# Allegro board temperature.brd
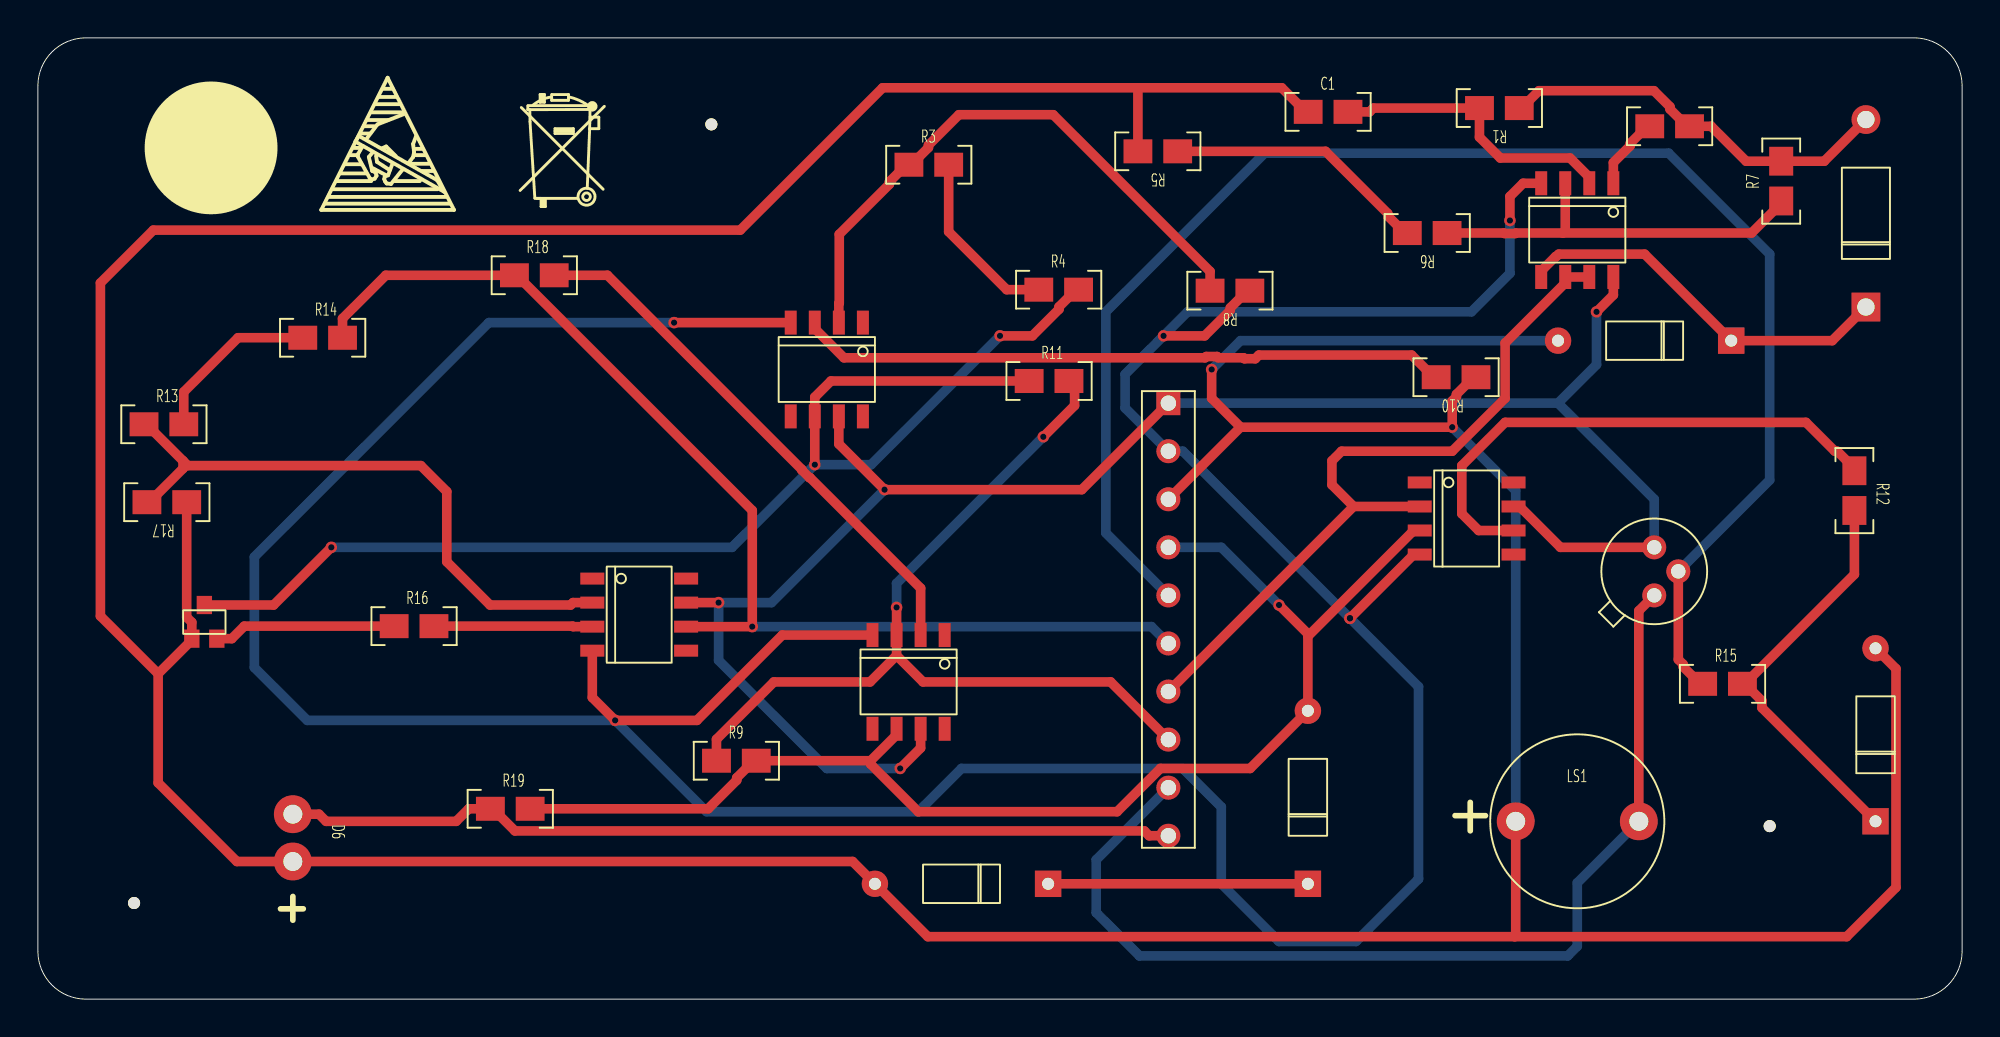
[diagram p0: board, top side]
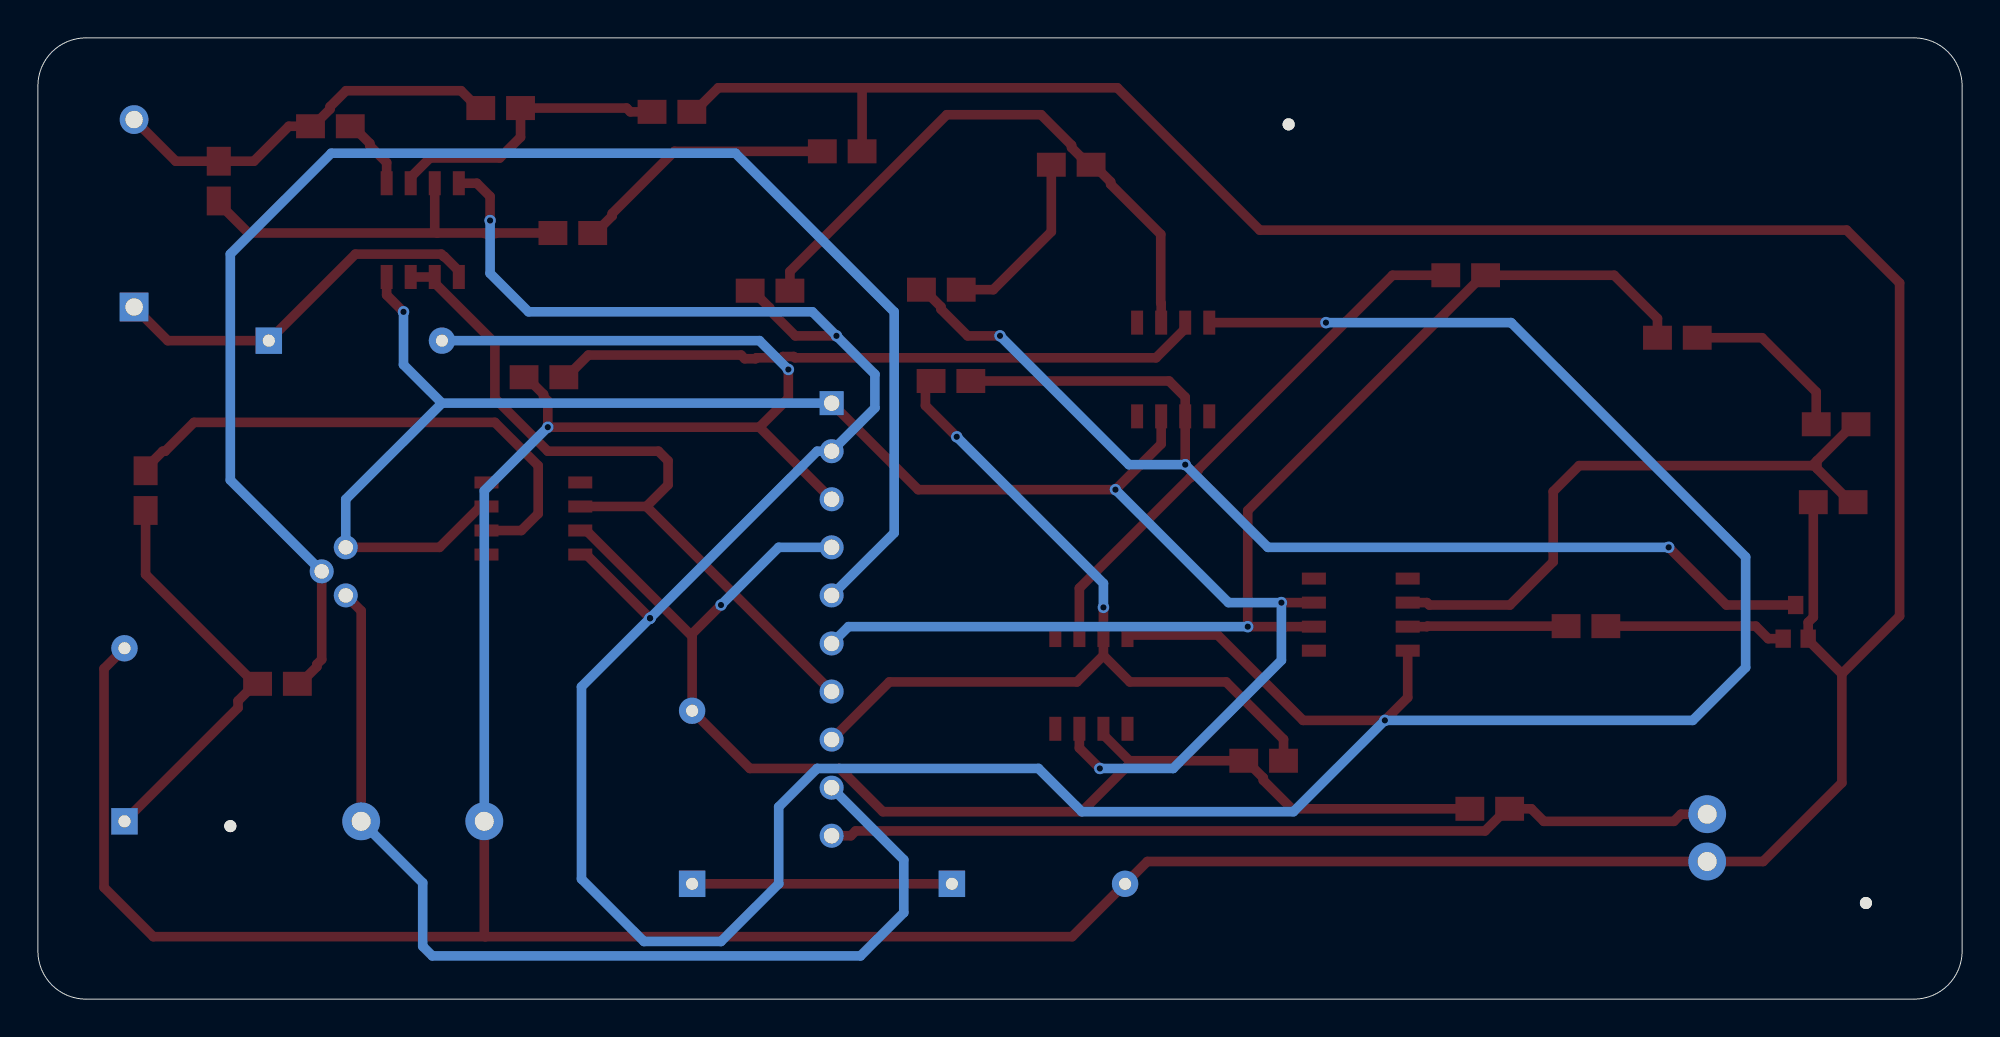
[diagram p1: board, bottom side, seen from below]

Outline 101.6 x 50.8 mm; copper layers: TOP, BOTTOM. Coordinates in mm from the lower left corner of the outline.
Outline path: 0,48.26 arc(0.74,50.06) 2.54,50.8 99.06,50.8 arc(100.86,50.06) 101.6,48.26 101.6,2.54 arc(100.86,0.74) 99.06,0 2.54,0 arc(0.74,0.74) 0,2.54 0,48.26

## Placement (name value [footprint] x y rotation side)
C1  0.1u  [0805]  68.07 46.99 0 top
D1  D1N5819/ON  [DO41-1]  96.52 36.58 0 top
D2  1n5231/ON  [DO35-1]  89.41 34.8 90 top
D3  1N4099  [DO35-1]  97.03 9.4 0 top
D4  1N4617  [DO35-1]  67.06 6.1 0 top
D5  1N4617  [DO35-1]  53.34 6.1 90 top
D6  LP_A676-TYP  [FG]  13.46 7.87 270 top
J1  HEADER 10  [SIP]  59.69 31.5 0 top
LS1  BUZZER  [FMQ]  81.28 9.4 0 top
NOREF  -  []  30.23 44.96 0 top
NOREF#2  -  [unnamed#2]  91.44 9.14 0 top
NOREF#3  -  [unnamed#2]  5.08 5.08 0 top
NOREF#4  -  []  9.65 45.21 0 top
NOREF#5  -  [unnamed#2]  35.56 46.23 0 top
NOREF#6  -  []  17.78 44.7 0 top
Q1  2N2222A  [TO18]  85.34 21.34 0 top
R1  4.7k  [0805]  77.22 46.99 180 top
R2  330  [0805]  86.11 46.23 0 top
R3  33k  [0805]  46.99 44.2 0 top
R4  2.4k  [0805]  53.85 37.59 0 top
R5  130k  [0805]  59.18 44.7 180 top
R6  9.1k  [0805]  73.41 40.39 180 top
R7  100k  [0805]  91.95 43.18 90 top
R8  100k  [0805]  62.99 37.34 180 top
R9  56k  [0805]  36.83 12.7 0 top
R10  100k  [0805]  74.93 32.77 180 top
R11  390  [0805]  53.34 32.77 0 top
R12  1.8k  [0805]  96.01 26.92 270 top
R13  30k  [0805]  6.6 30.48 0 top
R14  200  [0805]  14.99 35.05 0 top
R15  1.8k  [0805]  88.9 16.76 0 top
R16  100k  [0805]  19.81 19.81 0 top
R17  20k  [0805]  6.86 26.16 180 top
R18  10k  [0805]  26.16 38.35 0 top
R19  56  [0805]  24.89 10.16 0 top
U1  LM2904/ON  [SOIC8]  81.28 40.64 270 top
U2  LM741_1  [SOIC8]  75.44 25.4 0 top
U3  LM741_1  [SOIC8]  41.66 33.27 270 top
U4  TMP20  [SC70]  8.13 19.05 90 top
U5  LM741_1  [SOIC8]  31.75 20.32 0 top
U6  LM741_1  [SOIC8]  45.97 16.76 270 top

## Library data of the parts
C1 = C
D1 = D1N5819/ON_1
D2 = 1n5231/ON_0
D3 = 1N4099_0
D4 D5 = 1N4617_0
D6 = LP_A676-TYP
J1 = HEADER 10
LS1 = BUZZER
Q1 = 2N2222A
R1-R19 = R
U1 = LM2904/ON: Tolerance: ***; User Part Number: ***
U2 U3 U5 U6 = LM741_1: Tolerance: ***; User Part Number: ***
U4 = TMP20_0

## Footprints (pads in the part's own frame, mm; a bottom-side part is the same pattern mirrored in y, then rotated)
0805
  rect 1.524x1.27 smd: 1(-1,-0.1) 2(1.1,-0.1)
DO35-1
  round 1.397 hole 0.635: 1(0,9.144)
  rect 1.397x1.397 hole 0.635: 2(0,0)
DO41-1
  round 1.524 hole 0.914: 1(0,9.906)
  rect 1.524x1.524 hole 0.914: 2(0,0)
FG
  round 2 hole 1: 1(-1.9,0) 2(0.6,0)
FMQ
  round 2 hole 1: 1(-3.25,0) 2(3.25,0)
SC70
  rect 0.965x0.813 smd: 1(0,0) 2(0,-1.321) 3(1.778,-0.66)
SIP
  rect 1.27x1.27 hole 0.813: 1(0,0)
  round 1.27 hole 0.813: 2(0,-2.54) 3(0,-5.08) 4(0,-7.62) 5(0,-10.16) 6(0,-12.7) 7(0,-15.24) 8(0,-17.78) 9(0,-20.32) 10(0,-22.86)
SOIC8
  rect 1.27x0.635 smd: 1(-2.477,1.905) 2(-2.477,0.635) 3(-2.477,-0.635) 4(-2.477,-1.905) 5(2.477,-1.905) 6(2.477,-0.635) 7(2.477,0.635) 8(2.477,1.905)
TO18
  round 1.27 hole 0.762: 1(0,0) 2(1.27,1.27) 3(0,2.54)
unnamed#2
  round 0.635 hole 3.175 unplated: (0,0)

## Nets
+10V: J1.1 Q1.3(C) U1.8(V+) U2.7(V+) U3.7(V+) U5.7(V+) U6.7(V+)
-10V: J1.2 R8.1 U1.4(V-) U2.4(V-) U3.4(V-) U5.4(V-) U6.4(V-)
0: C1.1 D2.1 D3.1(A) D5.1(A) D6.2 J1.3 LS1.1(A) R5.2 R10.1 R17.1 U4.1(GND)
AC: J1.5 Q1.2(B) R15.1
BUZZER: J1.9 LS1.2(B) Q1.1(E)
DC: D4.1(A) J1.4 R9.2 R19.2 U2.3(IN+) U6.6(OUT)
LED: D6.1 J1.10 R19.1
REF: J1.8 R9.1 R11.2 U6.3(IN+)
SQUARE: J1.7 U1.6(-) U1.7(OUT) U2.2(IN-)
TEMP: J1.6 R14.2 R18.1 U5.6(OUT)
N41488: C1.2 R1.2 U1.2(-)
N41492: R6.1 R7.1 U1.3(+)
N41506: D1.1 R1.1 R2.2 R7.2
N41520: R2.1 U1.1(OUT)
N41530: D1.2 D2.2 U1.5(+)
N41862: R18.2 U6.2(IN-)
N42178: D3.2(K) R12.2 R15.2
N42252: R13.1 R17.2 U5.2(IN-)
N42450: R4.2 R11.1 U3.6(OUT) U4.3(V+)
N42584: R3.1 R8.2 U3.2(IN-)
N44906: D4.2(K) D5.2(K)
N50399: R16.2 U5.3(IN+)
N50887: R10.2 U3.3(IN+)
N51379: R16.1 U4.2(VOUT)
N58789: R5.1 R6.2
N59014: R3.2 R4.1
N59102: R13.2 R14.1
N421641: R12.1 U2.6(OUT)

Pads without a net: U2 1 5 8; U3 1 5 8; U5 1 5 8; U6 1 5 8

## Via types
v1: diameter 0.61, hole 0.33, TOP to BOTTOM, 23 vias

## Routing (per net, layer and track width the routed paths; a pad name or vN(x,y) marks a point on that pad's centre or on a via; arc(x,y) is an arc through that point)
+10V: length 98.7
  TOP w0.508: U1.8 83.19,37.21 v1(82.3,36.32) ; v1(45.53,12.19) 46.61,13.27 U6.7 ; U2.7 78.23,26.04 80.39,23.88 Q1.3 ; U3.7 42.29,29.34 v1(44.7,26.92) 55.12,26.92 J1.1 ; U5.7 v1(35.94,20.95)
  BOTTOM w0.508: 80.26,31.5 82.3,33.53 v1(82.3,36.32) ; 80.26,31.5 J1.1 ; 80.26,31.5 85.34,26.42 Q1.3 ; v1(44.7,26.92) 38.73,20.95 v1(35.94,20.95) 35.94,17.91 41.66,12.19 v1(45.53,12.19)
-10V: length 204.8
  TOP w0.508: U5.4 29.27,15.94 v1(30.48,14.73) 34.8,14.73 39.31,19.24 U6.4 ; U3.4 v1(33.59,35.75) ; U1.4 78.42,43.12 77.72,42.42 v1(77.72,41.15) ; v1(69.28,20.13) 72.64,23.49 U2.4 ; R8.1 63.86,37.44 62.96,36.53 62.96,36.41 61.61,35.05 v1(59.44,35.05)
  BOTTOM w0.508: v1(33.59,35.75) 23.81,35.75 11.43,23.37 11.43,17.53 14.22,14.73 v1(30.48,14.73) 35.31,9.91 46.48,9.91 48.77,12.19 60.45,12.19 62.48,10.16 62.48,6.1 65.53,3.05 69.6,3.05 72.9,6.35 72.9,16.51 v1(69.28,20.13) 60.45,28.96 J1.2 57.4,31.24 57.4,33.02 v1(59.44,35.05) 60.71,36.32 75.69,36.32 77.72,38.35 v1(77.72,41.15)
0: length 289.6
  TOP w0.508: 63.5,30.23 61.98,31.75 v1(61.98,33.27) ; 63.5,30.23 v1(74.68,30.23) 74.68,31.61 74.9,31.83 74.9,31.96 75.8,32.87 R10.1 ; 63.5,30.23 J1.3 ; 58.17,48.16 65.68,48.16 66.95,46.89 C1.1 ; 58.17,48.16 58.08,48.08 R5.2 ; 58.17,48.16 44.6,48.16 37.08,40.64 6.1,40.64 3.3,37.85 3.3,20.24 6.35,17.2 ; R17.1 7.86,20.18 8.13,19.91 U4.1 8.13,18.97 6.35,17.2 ; 6.35,17.2 6.35,11.43 10.51,7.27 D6.2 43.02,7.27 D5.1 46.99,3.3 77.98,3.3 ; D3.1 98.11,17.46 98.11,5.91 95.5,3.3 77.98,3.3 ; 77.98,3.3 78.03,3.35 LS1.1
  BOTTOM w0.508: v1(61.98,33.27) 63.5,34.8 D2.1 ; v1(74.68,30.23) 78.03,26.87 LS1.1
AC: length 82.4
  TOP w0.508: Q1.2 86.61,17.95 86.87,17.7 86.87,17.57 87.77,16.66 R15.1
  BOTTOM w0.508: Q1.2 91.44,27.43 91.44,39.37 86.11,44.7 64.77,44.7 56.39,36.32 56.39,24.64 v1(59.69,21.34)
BUZZER: length 55
  TOP w0.508: Q1.1 84.53,20.52 LS1.2
  BOTTOM w0.508: LS1.2 81.28,6.15 81.28,2.79 80.77,2.29 58.17,2.29 55.88,4.57 55.88,7.37 v1(59.69,11.18)
DC: length 69.4
  TOP w0.508: 67.06,19.18 D4.1 64.01,12.19 59.27,12.19 56.98,9.91 46.48,9.91 43.97,12.42 43.97,12.6 ; 67.06,19.18 67.06,19.3 v1(65.53,20.83) ; 67.06,19.18 72.64,24.76 U2.3 ; U6.6 45.34,13.97 43.97,12.6 ; R19.2 35.39,10.06 36.9,11.57 36.9,11.7 37.8,12.6 R9.2 43.97,12.6
  BOTTOM w0.508: v1(65.53,20.83) 62.48,23.88 v1(59.69,23.88)
LED: length 47.2
  TOP w0.508: D6.1 14.84,9.77 15.22,9.4 22.09,9.4 22.75,10.06 R19.1 24.02,10.06 25.19,8.89 58.42,8.89 58.67,8.64 J1.10
REF: length 47.2
  TOP w0.508: R11.2 54.74,32.37 54.74,31.37 v1(53.09,29.72) ; J1.8 56.64,16.76 46.74,16.76 45.34,18.16 ; v1(45.34,20.7) U6.3 45.34,18.16 ; R9.1 35.83,13.73 38.86,16.76 43.94,16.76 45.34,18.16
  BOTTOM w0.508: v1(53.09,29.72) 45.34,21.97 v1(45.34,20.7)
SQUARE: length 39.7
  TOP w0.508: 69.47,26.04 68.33,27.18 68.33,28.45 68.83,28.96 74.68,28.96 77.47,31.75 77.47,34.67 80.64,37.85 U1.6 U1.7 ; 69.47,26.04 J1.7 ; 69.47,26.04 U2.2
TEMP: length 60.7
  TOP w0.508: R14.2 16.09,35.97 18.37,38.25 R18.1 25.29,38.25 37.72,25.82 v1(37.72,19.68) U5.6
  BOTTOM w0.508: J1.6 58.8,19.68 v1(37.72,19.68)
N41488: length 15.6
  TOP w0.508: C1.2 70.32,46.89 70.52,47.09 R1.2 76.12,45.55 77.22,44.45 80.9,44.45 81.91,43.43 U1.2
N41492: length 21.1
  TOP w0.508: U1.3 80.64,40.61 80.52,40.49 ; 80.52,40.49 90.48,40.49 92.05,42.05 R7.1 ; 80.52,40.49 78.03,40.49 78.01,40.46 77.44,40.46 77.42,40.49 R6.1
N41506: length 21.2
  TOP w0.508: D1.1 94.32,44.28 R7.2 90.2,44.28 88.35,46.13 R2.2 87.08,46.13 86.17,47.03 86.17,47.16 85.33,48.01 79.26,48.01 78.34,47.09 R1.1
N41520: length 3.9
  TOP w0.508: U1.1 83.19,44.21 84.07,45.1 84.07,45.22 84.98,46.13 R2.1
N41530: length 20.5
  TOP w0.508: D1.2 94.74,34.8 D2.2 84.84,39.37 80.3,39.37 80.17,39.24 80.14,39.24 79.38,38.48 U1.5
N41862: length 28.7
  TOP w0.508: R18.2 30.07,38.25 40.34,27.99 40.34,27.96 40.74,27.56 40.77,27.56 46.61,21.72 U6.2
N42178: length 21.8
  TOP w0.508: 90.13,16.66 91.03,15.76 91.03,15.39 D3.2 ; 90.13,16.66 R15.2 ; 90.13,16.66 95.91,22.45 R12.2
N42252: length 32.9
  TOP w0.508: 7.66,28.45 7.92,28.19 20.22,28.19 21.59,26.82 21.59,23.11 23.88,20.83 28.13,20.83 28.26,20.95 U5.2 ; 7.66,28.45 7.66,28.04 5.88,26.26 R17.2 ; 7.66,28.45 5.73,30.38 R13.1
N42450: length 68.4
  TOP w0.508: R11.1 41.87,32.67 41.02,31.81 U3.6 v1(41.02,28.24) ; v1(15.49,23.88) 12.45,20.83 U4.3 ; R4.2 54.82,37.49 53.92,36.59 53.92,36.46 52.51,35.05 v1(50.8,35.05)
  BOTTOM w0.508: v1(50.8,35.05) 43.99,28.24 v1(41.02,28.24) 36.65,23.88 v1(15.49,23.88)
N42584: length 31.5
  TOP w0.508: R8.2 61.89,38.45 53.61,46.74 48.63,46.74 47.02,45.13 47.02,45 46.12,44.1 R3.1 45.86,44.1 44.96,43.19 44.96,43.06 42.31,40.42 42.31,36.79 42.29,36.77 U3.2
N44906: length 13.7
  TOP w0.508: v1(53.34,6.1) D4.2
N50399: length 8.4
  TOP w0.508: U5.3 28.26,19.68 28.23,19.71 R16.2
N50887: length 34.4
  TOP w0.508: R10.2 73.7,32.87 72.53,34.04 64.47,34.04 64.28,33.84 63.71,33.84 63.66,33.89 62.33,33.89 62.26,33.96 61.69,33.96 61.63,33.89 42.56,33.89 41.02,35.43 U3.3
N51379: length 9.6
  TOP w0.508: R16.1 10.9,19.71 10.24,19.05 U4.2
N58789: length 14
  TOP w0.508: R6.2 72.18,40.49 71.27,41.39 71.27,41.52 67.99,44.8 R5.1
N59014: length 9.6
  TOP w0.508: R3.2 48.09,40.56 51.15,37.49 R4.1
N59102: length 9.2
  TOP w0.508: R14.1 10.57,34.95 7.7,32.09 R13.2
N421641: length 28.4
  TOP w0.508: R12.1 95.91,28.05 95.01,28.96 94.88,28.96 93.36,30.48 77.47,30.48 75.18,28.19 75.18,25.65 76.07,24.76 U2.6
